# Altium PCB ultrasound module1.0 - 改.PcbDoc
Units mm, origin at the board's own origin, x right, y up, seen from the top; angles counter-clockwise.
Board outline 38.35 x 60.45 mm, 2 copper layers (Top Layer, Bottom Layer); 50 components, 40 nets, 150 pads, 72 vias.
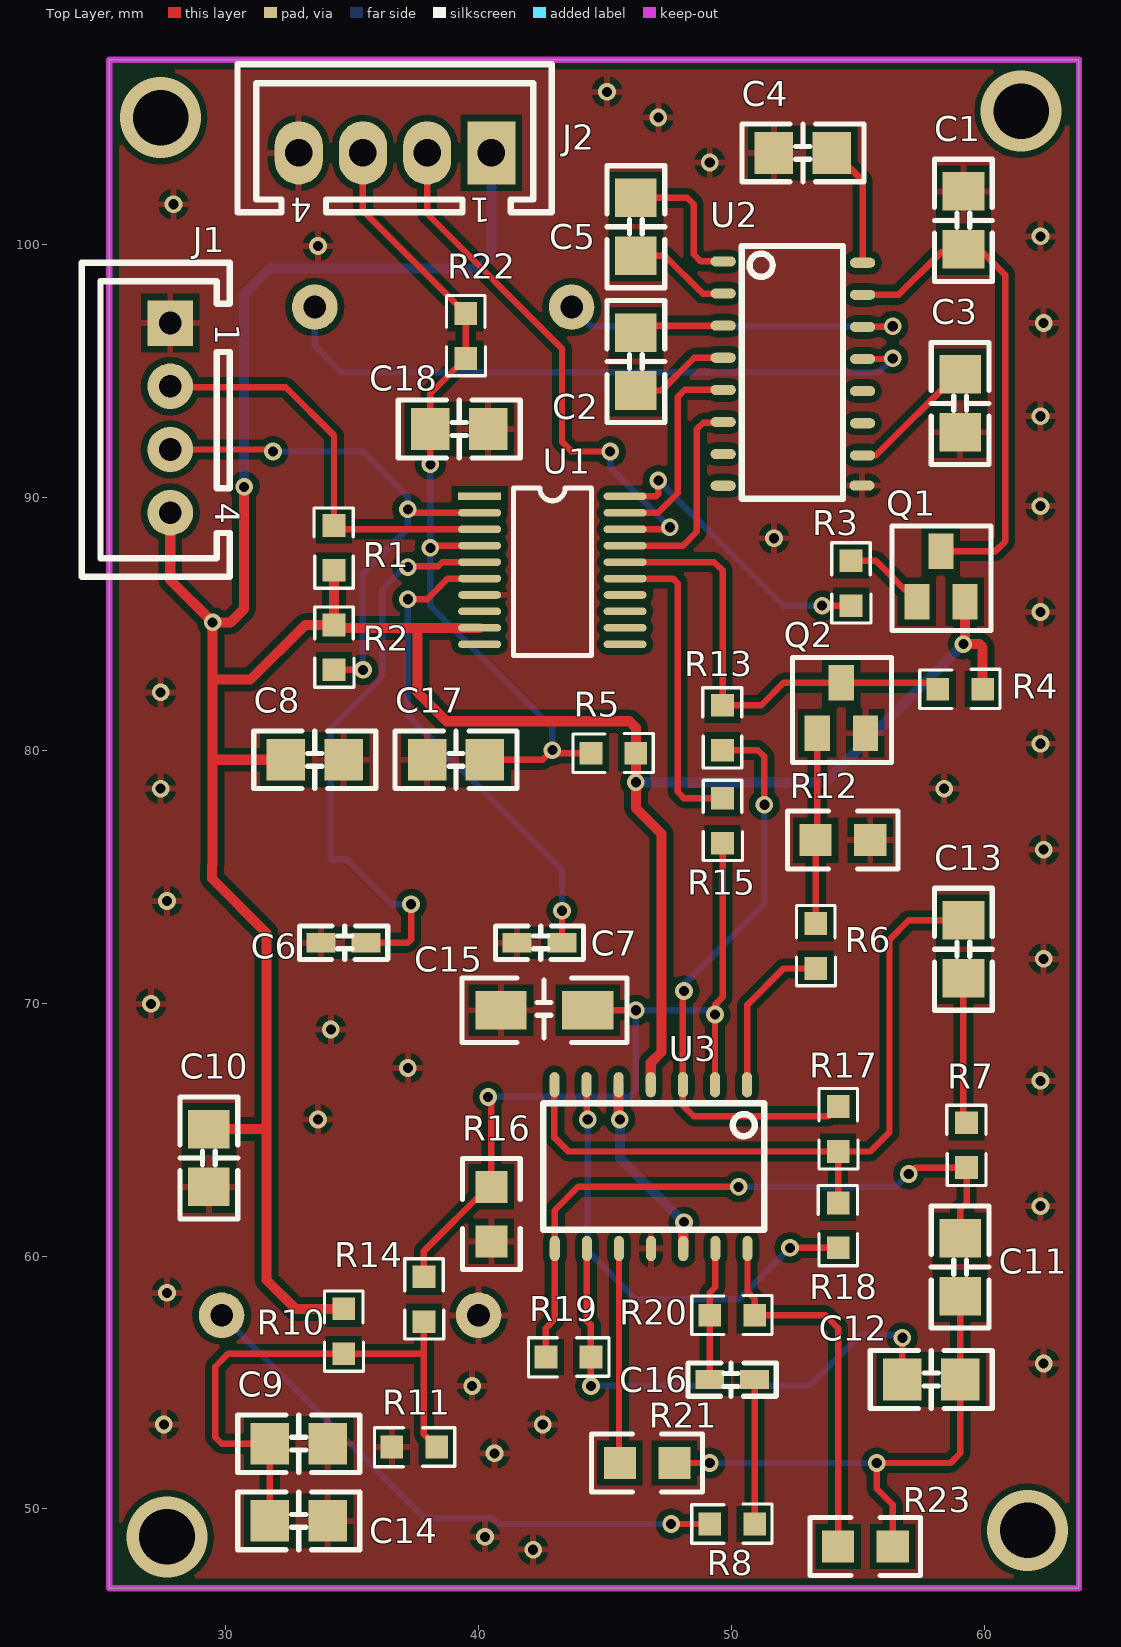
[diagram p0: Top Layer view]
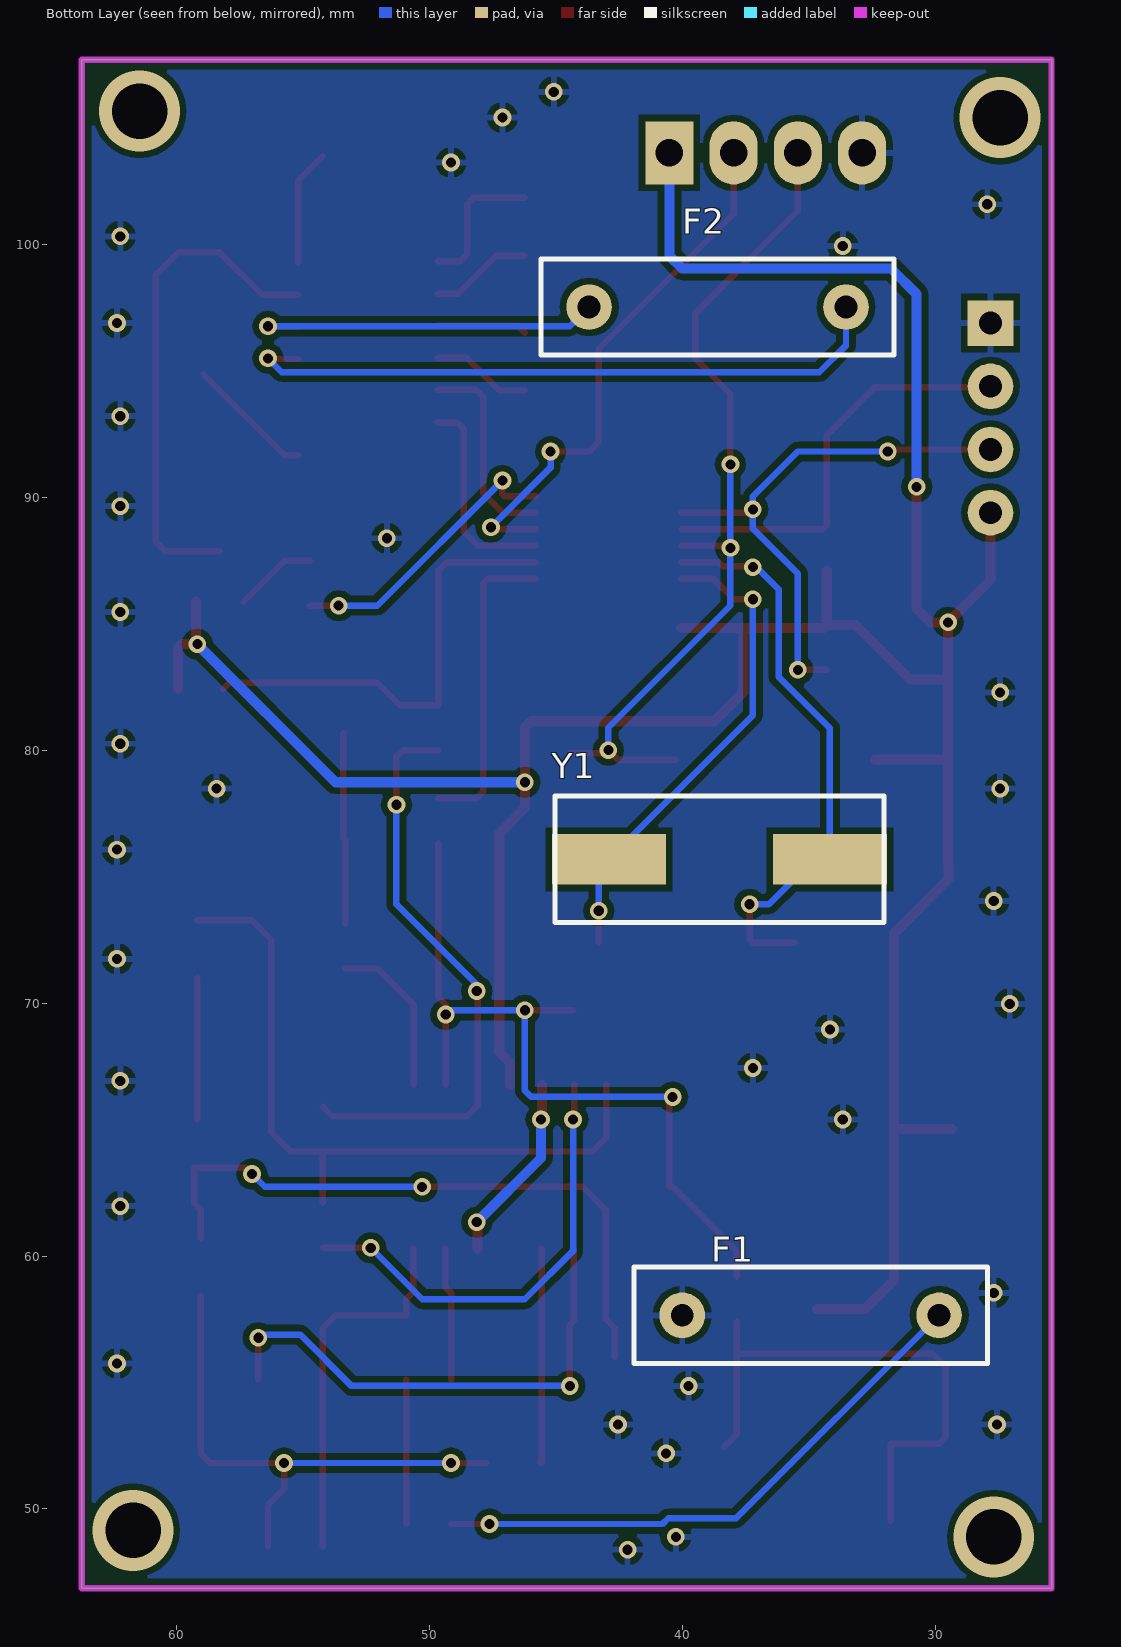
[diagram p1: Bottom Layer view, seen from below]

## Layer stack, top to bottom
Top Solder: solder mask 0.0102, Solder Resist, Dk 3.5
Top Layer: signal copper 0.0356
Dielectric 1: dielectric 0.32, FR-4, Dk 4.8
Bottom Layer: signal copper 0.0356
Bottom Solder: solder mask 0.0102, Solder Resist, Dk 3.5

## Board outline
25.4,46.863 25.4,107.315 63.754,107.315 63.754,46.863

## Design rules (kind name [scope] priority, off if disabled: settings)
Clearance [All] p1: gap=0.254
PolygonConnect [All] p1: connectstyle=Relief reliefconductorwidth=0.254 reliefentries=4 polygonreliefangle="90 Angle" airgapwidth=0.254
RoomDefinition "ultrasound module1.0 - 改" [InComponentClass('ultrasound module1.0 - 改')] p1: confinementstyle=ConfineIn formatcopy=TRUE lockcomponents=FALSE outline 0,0 50.8,0 50.8,25.4 0,25.4
RoutingVias [All] p1: holewidth=0.4 width=0.7 viastyle="Through Hole" minholewidth=0.1 minwidth=0.1 maxholewidth=0.4 maxwidth=0.7
SolderMaskExpansion [All] p1: expansion=0.102
Width [All] p1: maxlimit=0.5 minlimit=0.254 preferedwidth=0.254
30 further rules are at their usual default settings.

## Components (designator, comment, footprint, x,y, rotation, side; value= is the part's Value field where it differs from the comment)
C1 "100nF/0805/5%" 0805C 59.182,100.965 r270 top
C2 "100nF/0805/5%" 0805C 46.228,95.377 r270 top
C3 "100nF/0805/5%" 0805C 59.055,93.726 r90 top
C4 "100nF/0805/5%" 0805C 52.832,103.632 r180 top
C5 "100nF/0805/5%" 0805C 46.228,100.711 r90 top
C6 "22pF/0603/5%" 0603C 34.671,72.39 r0 top
C7 "22pF/0603/5%" 0603C 42.418,72.39 r0 top
C8 "100nF/0805/5%" 0805C 33.528,79.629 r180 top
C9 "100nF/0805/5%" 0805C 32.893,52.578 r180 top
C10 "100nF/0805/5%" 0805C 29.337,63.881 r90 top
C11 "1nF/50V/0805/10%" 0805C 59.055,59.563 r270 top
C12 "1nF/50V/0805/10%" 0805C 57.912,55.118 r0 top
C13 "100nF/0805/5%" 0805C 59.182,72.136 r270 top
C14 "100nF/0805/5%" 0805C 32.893,49.53 r180 top
C15 "100nF/1206" 1206C 44.323,69.723 r0 top
C16 "100nF/50V/0603/10%" 0603C 50.038,55.118 r180 top
C17 "100nF/0805/5%" 0805C 39.116,79.629 r0 top
C18 "100nF/0805/5%" 0805C 39.243,92.71 r0 top
F1 "Speaker" RAD-0.4 34.925,57.658 r0 bottom
F2 "Speaker" RAD-0.4 38.608,97.536 r180 bottom
J1 "HA-4A(蓝色)" HA-4A#1 27.813,96.901 r270 top locked
J2 "CON-4" HA-4A#2 40.513,103.632 r180 top
Q1 "MMBT3906" SOT-23B 58.293,87.884 r0 top
Q2 "MMBT3904" SOT-23B 54.356,82.677 r0 top
R1 "10KΩ/0603/1%" 0603 34.29,88.9 r270 top
R2 "10KΩ/0603/1%" 0603 34.29,83.185 r90 top
R3 "1KΩ/0603/5%" 0603 54.737,85.725 r90 top
R4 "10KΩ/0603/1%" 0603 59.944,82.423 r180 top
R5 "10KΩ/0603/1%" 0603 46.228,79.883 r180 top
R6 "10KΩ/0603/1%" 0603 53.34,71.374 r90 top
R7 "10KΩ/0603/1%" 0603 59.309,65.278 r270 top
R8 "10KΩ/0603/1%" 0603 50.927,49.403 r180 top
R10 "1KΩ/0603/5%" 0603 34.671,56.134 r90 top
R11 "1KΩ/0603/5%" 0603 36.576,52.451 r0 top
R12 "4.3KΩ/0805" 0805 53.34,76.454 r0 top
R13 "1KΩ/0603/5%" 0603 49.657,81.788 r270 top
R14 "150KΩ/0603/1%" 0603 37.846,57.404 r90 top
R15 "0Ω/0603/5%" 0603 49.657,76.327 r90 top
R16 "470KΩ/0805/1%" 0805 40.513,62.738 r270 top
R17 "2KΩ/0603/5%" 0603 54.229,64.135 r90 top
R18 "76.8KΩ/0603/1%" 0603 54.229,62.103 r270 top
R19 "76.8KΩ/0603/1%" 0603 42.672,56.007 r0 top
R20 "47KΩ/0603/1%" 0603 50.927,57.658 r180 top
R21 "150Ω/0805/5%" 0805 45.593,51.816 r0 top
R22 "0Ω/0603/5%" 0603 39.497,95.504 r90 top
R23 "6.8KΩ/0805" 0805 54.229,48.514 r0 top
U1 "STM8S103F2P6-2" TSSOP20 42.926,87.122 r0 top
U2 "ST202" ST202 50.419,99.949 r270 top
U3 "TL074" TL074 51.308,66.04 r180 top
Y1 "4M" SMD-49 34.163,75.692 r0 bottom

## Footprints (in the part's own frame and the unit in brackets; to place one, negate y for a bottom-side part, rotate by r counter-clockwise, add the part's x,y. Pads: shape width x height; smd on the part's side, far side on the other; paste and mask are expansions set on the pad)
0603 [mm]
  rect 0.9x0.9 smd: 1(0,0) 2(1.778,0)
  silkscreen extent -0.69,-0.79 2.49,0.76
0603C [mil]
  rect 45x30 smd: 1(-35,0) 2(35,0)
  silkscreen extent -69,-26 69,26
0805 [mil]
  rect 50x50 smd: 1(0,0) 2(85,0)
  silkscreen extent -44,-45 129,45
0805C [mil]
  rect 60x65 smd: 1(-45,0) 2(45,0)
  silkscreen extent -95,-45 95,45
1206C [mil]
  rect 80x60 smd: 1(-135,0) 2(0,0)
  silkscreen extent -196,-50 61,50
HA-4A#1 [mm]
  rect 1.8x1.8 hole 0.9: 1(0,0)
  round 1.8 hole 0.9: 2(2.5,0) 3(5,0) 4(7.5,0)
  silkscreen extent -2.39,-3.5 10.04,2.35
HA-4A#2 [mm]
  rect 1.905x2.5 hole 1.092: 1(0,0)
  oval 1.905x2.5 hole 1.092: 2(2.54,0) 3(5.08,0) 4(7.62,0)
  silkscreen extent -2.39,-3.5 10.04,2.35
RAD-0.4 [mm] "Radial Cap, Thru-Hole; 2 Leads; 0.4 in Pin Spacing"
  round 1.8 hole 0.9: 1(-5.08,0) 2(5.08,0)
  silkscreen extent -6.98,-1.91 6.98,1.91
SMD-49 [mm]
  rect 4.5x2 smd: 1(0,0) 2(8.738,0)
  silkscreen extent -2.13,-2.5 10.87,2.5
SOT-23B [mm]
  rect 1x1.4 smd: B(-0.95,-2) C(0,0) E(0.95,-2)
  silkscreen extent -1.93,-3.15 1.98,0.99
ST202 [mm]
  oval 0.4x1 smd: 1(0.61,-0.737) 2(1.88,-0.737) 3(3.15,-0.737) 4(4.42,-0.737) 5(5.69,-0.737) 6(6.96,-0.737) 7(8.23,-0.737) 8(9.48,-0.737) 9(9.474,4.75) 10(8.28,4.775) 11(7.01,4.775) 12(5.74,4.775) 13(4.47,4.775) 14(3.2,4.775) 15(1.93,4.775) 16(0.66,4.775)
  silkscreen extent 0,0 10,4
TL074 [mm]
  oval 0.4x1 smd: 1(0.68,-0.737) 2(1.95,-0.737) 3(3.22,-0.737) 4(4.49,-0.737) 5(5.76,-0.737) 6(7.03,-0.737) 7(8.3,-0.737) 8(8.286,5.74) 9(7.016,5.74) 10(5.746,5.74) 11(4.476,5.74) 12(3.206,5.74) 13(1.936,5.74) 14(0.666,5.74)
  silkscreen extent 0,0 8.75,5
TSSOP20 [mm]
  rect 1.7x0.3 smd: 1(-2.875,2.925)
  oval 1.7x0.3 smd: 2(-2.875,2.275) 3(-2.875,1.625) 4(-2.875,0.975) 5(-2.875,0.325) 6(-2.875,-0.325) 7(-2.875,-0.975) 8(-2.875,-1.625) 9(-2.875,-2.275) 10(-2.875,-2.925) 11(2.875,-2.925) 12(2.875,-2.275) 13(2.875,-1.625) 14(2.875,-0.975) 15(2.875,-0.325) 16(2.875,0.325) 17(2.875,0.975) 18(2.875,1.625) 19(2.875,2.275) 20(2.875,2.925)
  silkscreen extent -1.54,-3.37 1.54,3.25, body extent -3.2,-3.25 3.2,3.25, height 1.03

## Part data
C1 C2 C3 C4 C5 C8 C9 C10 C13 C14 C17 C18: library part 贴片电容104J/100nF/50V/0805封装/5%/X7R/环保
C6 C7: library part 贴片电容22PF/0603封装/精度5%/NPO/环保
C11 C12: library part 贴片电容102/1nF/50V/0805封装/10%/N7R/环保
C15: library part 贴片电容104/100nF/1206封装/环保
C16: library part 贴片电容100nF（104M）/50V/0603封装/10%/X7R/环保
F1 F2: "Loudspeaker"
J1: library part 带勾小直脚HA-4A(蓝色)/环保
J2: library part 带勾小直脚HA-4A(白色)/环保
Q1: library part 贴片三极管MMBT3906/sot-23/环保
Q2: library part 贴片三极管1AM/MMBT3904/sot-23封装环保
R1 R2 R4 R5 R6 R7 R8: library part 贴片电阻10kΩ(1%)/0603封装/环保
R3 R10 R11 R13: library part 贴片电阻1K/(5%)/0603封装/环保
R12: library part 贴片电阻4.3KΩ/0805封装/环保
R14: library part 贴片电阻150kΩ(1%)/0603封装/环保
R15 R22: library part 贴片电阻0Ω/(5%)/0603封装/环保
R16: library part 贴片电阻470KΩ/0805封装/1%精度/环保
R17: library part 贴片电阻2K/(5%)/0603封装/环保
R18 R19: library part 贴片电阻76.8KΩ/0603封装/精度1%/环保
R20: library part 贴片电阻47K/1%/0603封装/环保
R21: library part 贴片电阻150/(5%)/0805封装/环保
R23: library part 贴片电阻6.8KΩ/0805封装/环保
U1: library part 单片机STM8S103F2P6/TSSOP-20封装/环保_1
Y1: library part 晶振48.0M/环保, "32.768KHz"

## Via types
v1: diameter 0.7, hole 0.4, Top Layer to Bottom Layer, 68 vias
v2: diameter 3.2, hole 2.2, Top Layer to Bottom Layer, 4 vias

## Nets (pads, with @x,y where several pads share a name; then routed paths per layer and width w, separated by ;. In a path a pad name is that pad's centre, name@x,y a point inside that pad or via, vN(x,y) a via of type N, cw(c..) or ccw(c..) an arc to the next point about the centre after c; other vN are vias at no path point)
1/2VCC: U3.5 U3.12 | length 7.6
  Top Layer w0.4: U3.5 45.548,65.45 v1(45.593,65.405) ; U3.12 48.102,61.31 v1(48.133,61.341)
  Bottom Layer w0.4: v1(45.593,65.405) 45.593,63.881 v1(48.133,61.341)
GND: C1.1 C3.1 C4.2 C6.1 C7.1 C8.1 C9.1 C10.1 C14.1 C15.1 C17.1 C18.2 F1.2 J1.1 J2.4 Q2.E R11.1 R12.2 R16.2 U1.7 U2.9 U3.11
  other v1: 42.164,48.387 40.259,48.895 40.64,52.197 27.559,53.34 42.545,53.34 39.751,54.864 62.357,55.753 27.686,58.547 62.23,61.976 33.655,65.405 62.23,66.929 37.211,67.437 34.163,68.961 27.051,69.977 62.357,71.755 27.686,74.041 62.357,76.073 27.432,78.486 58.42,78.486 62.23,80.264 27.432,82.296 62.23,85.471 51.689,88.392 62.23,89.662 62.23,93.218 62.357,96.901 33.655,99.949 62.23,100.33 27.94,101.6 49.149,103.251 47.117,105.029 45.085,106.045
NetC1_2: C1.2 Q1.C U2.15 | length 19.9
  Top Layer w0.254: U2.15 56.617,98.019 58.293,99.695 59.944,99.695 60.833,98.806 60.833,88.265 60.452,87.884 Q1.C
NetC2_1: C2.1 U2.3 | length 3.6
  Top Layer w0.254: C2.1 46.507,96.799 U2.3
NetC2_2: C2.2 U2.4 | length 4
  Top Layer w0.254: C2.2 47.244,94.234 48.539,95.529 U2.4
NetC3_2: C3.2 U2.10 | length 5.1
  Top Layer w0.254: U2.10 55.728,91.669 C3.2@58.928,94.869
NetC4_1: C4.1 U2.16 | length 4.6
  Top Layer w0.254: C4.1@54.229,103.505 55.194,102.54 U2.16
NetC5_1: C5.1 U2.2 | length 4.1
  Top Layer w0.254: C5.1 47.371,99.568 48.87,98.069 U2.2
NetC5_2: C5.2 U2.1 | length 5.7
  Top Layer w0.254: C5.2 48.26,101.854 48.514,101.6 48.514,99.619 48.793,99.339 U2.1
NetC6_2: C6.2 U1.5 Y1.1 | length 23
  Top Layer w0.254: C6.2 37.211,72.39 37.338,72.517 v1(37.338,73.914) ; v1(37.211,87.249) 37.242,87.28 38.403,87.28 38.57,87.447 U1.5
  Bottom Layer w0.254: v1(37.211,87.249) 37.066,87.249 36.195,86.378 36.195,82.913 34.163,80.881 Y1.1 34.798,75.692 36.576,73.914 v1(37.338,73.914)
NetC7_2: C7.2 U1.6 Y1.2 | length 19.3
  Top Layer w0.254: v1(37.211,85.979) 37.973,85.979 38.791,86.797 U1.6 ; C7.2@43.282,72.415 C7.2 v1(43.307,73.66)
  Bottom Layer w0.254: v1(37.211,85.979) 37.211,81.382 Y1.2 43.307,75.286 v1(43.307,73.66)
NetC9_2: C9.2 C14.2 R10.1 R11.2 R14.1 | length 21.7
  Top Layer w0.254: C14.2 C9.2 29.845,52.578 29.591,52.832 29.591,55.626 30.099,56.134 R10.1 37.846,56.134 ; R14.1 37.846,56.134 ; R11.2 37.846,52.959 37.846,56.134
NetC11_1: C11.1 R7.2 R19.1 U3.8 | length 25.8
  Top Layer w0.254: R19.1 42.672,57.15 43.022,57.5 U3.8 43.022,61.818 43.942,62.738 v1(50.292,62.738) ; v1(57.023,63.246) 57.277,63.5 R7.2 59.309,62.103 59.055,61.849 C11.1
  Bottom Layer w0.254: v1(50.292,62.738) 56.515,62.738 v1(57.023,63.246)
NetC11_2: C11.2 C12.2 R21.2 R23.2 | length 21.2
  Top Layer w0.254: R21.2 v1(49.149,51.816) ; R23.2 56.388,50.165 55.753,50.8 v1(55.753,51.816) 58.674,51.816 59.055,52.197 C12.2 C11.2
  Bottom Layer w0.254: v1(49.149,51.816) v1(55.753,51.816)
NetC12_1: C12.1 R19.2 U3.9 | length 20.4
  Top Layer w0.254: U3.9 44.292,57.435 44.45,57.277 R19.2 v1(44.45,54.864) ; C12.1 v1(56.769,56.769)
  Bottom Layer w0.254: v1(44.45,54.864) 53.086,54.864 55.118,56.896 56.642,56.896 v1(56.769,56.769)
NetC13_1: C13.1 R17.1 R18.1 U3.7 | length 28.8
  Top Layer w0.254: U3.7 43.008,64.688 43.561,64.135 R17.1 ; R18.1 R17.1 ; C13.1 57.023,73.279 56.261,72.517 56.261,64.897 55.499,64.135 R17.1
NetC13_2: C13.2 R7.1 | length 5.6
  Top Layer w0.254: R7.1@59.182,65.405 C13.2
NetC15_2: C15.2 R14.2 R15.1 R16.1 U3.2 | length 32.2
  Top Layer w0.254: R14.2 37.846,60.198 40.386,62.738 R16.1 40.513,66.167 v1(40.386,66.294) ; C15.2 v1(46.228,69.723) ; U3.2 v1(49.358,69.551) 49.358,69.932 49.657,70.231 R15.1
  Bottom Layer w0.254: v1(40.386,66.294) 45.974,66.294 46.228,66.548 v1(46.228,69.723) 49.186,69.723 v1(49.358,69.551)
NetC16_1: C16.1 R8.1 | length 5.7
  Top Layer w0.254: R8.1 C16.1
NetC16_2: C16.2 R20.2 U3.13 | length 5.3
  Top Layer w0.254: C16.2 R20.2 49.149,58.547 49.372,58.77 U3.13
NetF1_1: F1.1 R8.2 | length 22.9
  Top Layer w0.254: v1(47.625,49.403) R8.2
  Bottom Layer w0.254: F1.1 37.877,49.626 40.562,49.626 40.785,49.403 v1(47.625,49.403) v1@47.498,49.276
NetF2_1: F2.1 U2.14 | length 14.6
  Top Layer w0.254: U2.14 56.363,96.749 v1(56.388,96.774)
  Bottom Layer w0.254: F2.1@43.434,97.79 F2.1 44.45,96.774 v1(56.388,96.774)
NetF2_2: F2.2 U2.13 | length 26.2
  Top Layer w0.254: U2.13 56.363,95.479 v1(56.388,95.504)
  Bottom Layer w0.254: F2.2 33.528,96.012 34.58,94.96 55.844,94.96 v1(56.388,95.504)
NetQ1_b: Q1.B R3.2 | length 3.3
  Top Layer w0.254: R3.2 55.724,87.503 Q1.B
NetQ2_b: Q2.B R6.2 R12.1 | length 7.5
  Top Layer w0.254: R6.2 R12.1 ; R12.1@53.406,76.52 Q2.B
NetR6_1: R6.1 U3.1 | length 6.5
  Top Layer w0.254: U3.1 50.628,69.932 52.07,71.374 R6.1
NetR13_2: R13.2 R17.2 U3.3 | length 23.4
  Top Layer w0.254: v1(48.133,70.485) 48.088,70.44 U3.3 48.088,65.958 48.514,65.532 53.848,65.532 R17.2 ; R13.2 51.054,80.01 51.308,79.756 v1(51.308,77.851)
  Bottom Layer w0.254: v1(48.133,70.485) 48.133,70.739 51.308,73.914 v1(51.308,77.851)
NetR18_2: R18.2 U3.6 | length 18.1
  Top Layer w0.254: U3.6 44.278,65.45 v1(44.323,65.405) ; v1(52.324,60.325) R18.2
  Bottom Layer w0.254: v1(44.323,65.405) 44.323,60.198 46.228,58.293 50.292,58.293 v1(52.324,60.325)
NetR20_1: R20.1 R23.1 U3.14 | length 14.9
  Top Layer w0.254: U3.14 50.642,58.578 50.927,58.293 R20.1 53.721,57.658 54.229,57.15 R23.1
NetR21_1: R21.1 U3.10 | length 8.5
  Top Layer w0.254: U3.10 45.562,51.847 R21.1
PC5: R15.2 U1.15 | length 12.3
  Top Layer w0.254: U1.15 47.696,86.797 47.879,86.614 47.879,78.359 48.133,78.105 R15.2
PC6: Q2.C R4.2 R13.1 U1.16 | length 18.3
  Top Layer w0.254: U1.16 49.332,87.447 49.657,87.122 R13.1 51.181,81.788 52.07,82.677 Q2.C 57.912,82.677 R4.2
PC7: U1.17 U2.6 | length 8.3
  Top Layer w0.254: U1.17 48.092,88.097 48.641,88.646 48.641,92.71 48.895,92.964 49.657,92.964 U2.6
PD1/SWIM: J2.2 U1.18 | length 21.5
  Top Layer w0.254: J2.2 37.973,101.219 43.307,95.885 43.307,92.202 43.688,91.821 v1(45.212,91.821) ; U1.18 47.345,88.747 47.426,88.828 v1(47.571,88.828) v1@47.571,88.846
  Bottom Layer w0.254: v1(45.212,91.821) 45.212,91.187 v1(47.571,88.828)
PD2: U1.19 U2.5 | length 8.1
  Top Layer w0.254: U1.19 47.106,89.397 47.879,90.17 47.879,93.98 48.158,94.259 U2.5
PD3: R3.1 U1.20 | length 11.6
  Top Layer w0.254: U1.20 47.038,90.047 47.117,90.126 v1(47.117,90.678) ; v1(53.594,85.725) R3.1
  Bottom Layer w0.254: v1(47.117,90.678) 52.07,85.725 v1(53.594,85.725)
PD5: J1.3 R2.1 U1.2 | length 21.9
  Top Layer w0.254: J1.3 31.797,91.901 v1(31.877,91.821) ; R2.1 v1(35.433,83.185) ; v1(37.211,89.535) 37.211,89.408 37.222,89.397 U1.2
  Bottom Layer w0.254: v1(31.877,91.821) 35.433,91.821 37.211,90.043 v1(37.211,89.535) 37.211,88.773 35.433,86.995 v1(35.433,83.185)
PD6: J1.2 R1.1 U1.3 | length 16.6
  Top Layer w0.254: J1.2@27.813,94.361 32.385,94.361 34.29,92.456 R1.1 34.443,88.747 U1.3
RESET: C17.2 C18.1 J2.3 R5.2 R22.1 R22.2 U1.4 | length 34.3
  Top Layer w0.254: J2.3 35.433,101.346 R22.2 R22.1 38.1,94.107 C18.1 v1(38.1,91.313) ; v1(38.1,88.011) 38.1,88.056 38.141,88.097 U1.4 ; C17.2 42.545,79.629 v1(42.926,80.01) 43.053,79.883 R5.2
  Bottom Layer w0.254: v1(38.1,91.313) v1(38.1,88.011) 38.1,85.725 42.926,80.899 v1(42.926,80.01)
VCC: C8.2 C10.2 J1.4 J2.1 Q1.E R1.2 R2.2 R4.1 R5.1 R10.2 U1.9 U3.4 | length 128.5
  Top Layer w0.4: J1.4 27.813,86.741 v1(29.489,85.065) ; C10.2 31.623,65.024 ; v1(30.734,90.424) 30.734,85.598 30.201,85.065 v1(29.489,85.065) ; C8.2 29.489,79.629 ; R1.2 R2.2 ; R10.2 32.766,57.912 31.623,59.055 31.623,65.024 ; 37.592,84.833 37.592,82.296 38.735,81.153 45.974,81.153 46.228,80.899 R5.1 v1(46.228,78.74) 46.228,77.724 47.244,76.708 47.244,68.072 46.818,67.646 U3.4 ; U1.9 34.406,84.847 R2.2 ; v1(59.182,84.201) 59.817,84.201 59.944,84.074 R4.1 ; v1@59.243,84.262 Q1.E ; 29.489,79.629 29.489,75.463 29.464,75.438 29.464,74.93 31.623,72.771 31.623,65.024 ; 29.489,79.629 29.489,82.804 ; 29.489,82.804 30.988,82.804 33.147,84.963 R2.2 ; 29.489,82.804 v1(29.489,85.065)
  Bottom Layer w0.4: v1(30.734,90.424) 30.734,98.044 31.75,99.06 40.005,99.06 40.513,99.568 J2.1 ; v1(46.228,78.74) 53.721,78.74 v1(59.182,84.201)
pads on no net: U1.1 U1.8 U1.10 U1.11 U1.12 U1.13 U1.14 U2.7 U2.8 U2.11 U2.12
copper on no net:
  other v2: 27.686,48.895 61.722,49.149 27.432,105.029 61.468,105.283

## Polygon pours and split planes (outlines as drawn)
GND on Top Layer "Keep-Out Layer-No Net" (solid, remove dead copper, pour order 16): 25.4,107.315 63.754,107.315 63.754,46.863 25.4,46.863
GND on Bottom Layer "Keep-Out Layer-No Net" (solid, remove dead copper, pour order 18): 63.754,107.315 25.4,107.315 25.4,46.863 63.627,46.863 63.754,46.99

## Keep-outs
Keep-Out Layer:
  the board outline again, w0.254

## Silkscreen, mask and mechanical layers (free items; w line width, h text height)
Top Overlay:
  circle w0.254: c51.181,99.187 r0.458

## Text inside footprints (layer, text, board x,y; h text height)
J1: Top Overlay "1" at 29.591,96.876 h0.97 r270; Top Overlay "4" at 29.591,89.789 h0.97 r270
J2: Top Overlay "4" at 33.401,101.854 h0.97 r180; Top Overlay "1" at 40.488,101.854 h0.97 r180